# Altium PCB Greinke_Boost_Converter.PcbDoc
Units mil, origin at the board's own origin, x right, y up, seen from the top; angles counter-clockwise.
Board outline 2988 x 3674 mil, 2 copper layers (Top Layer, Bottom Layer); 23 components, 45 nets, 67 pads, 12 vias.
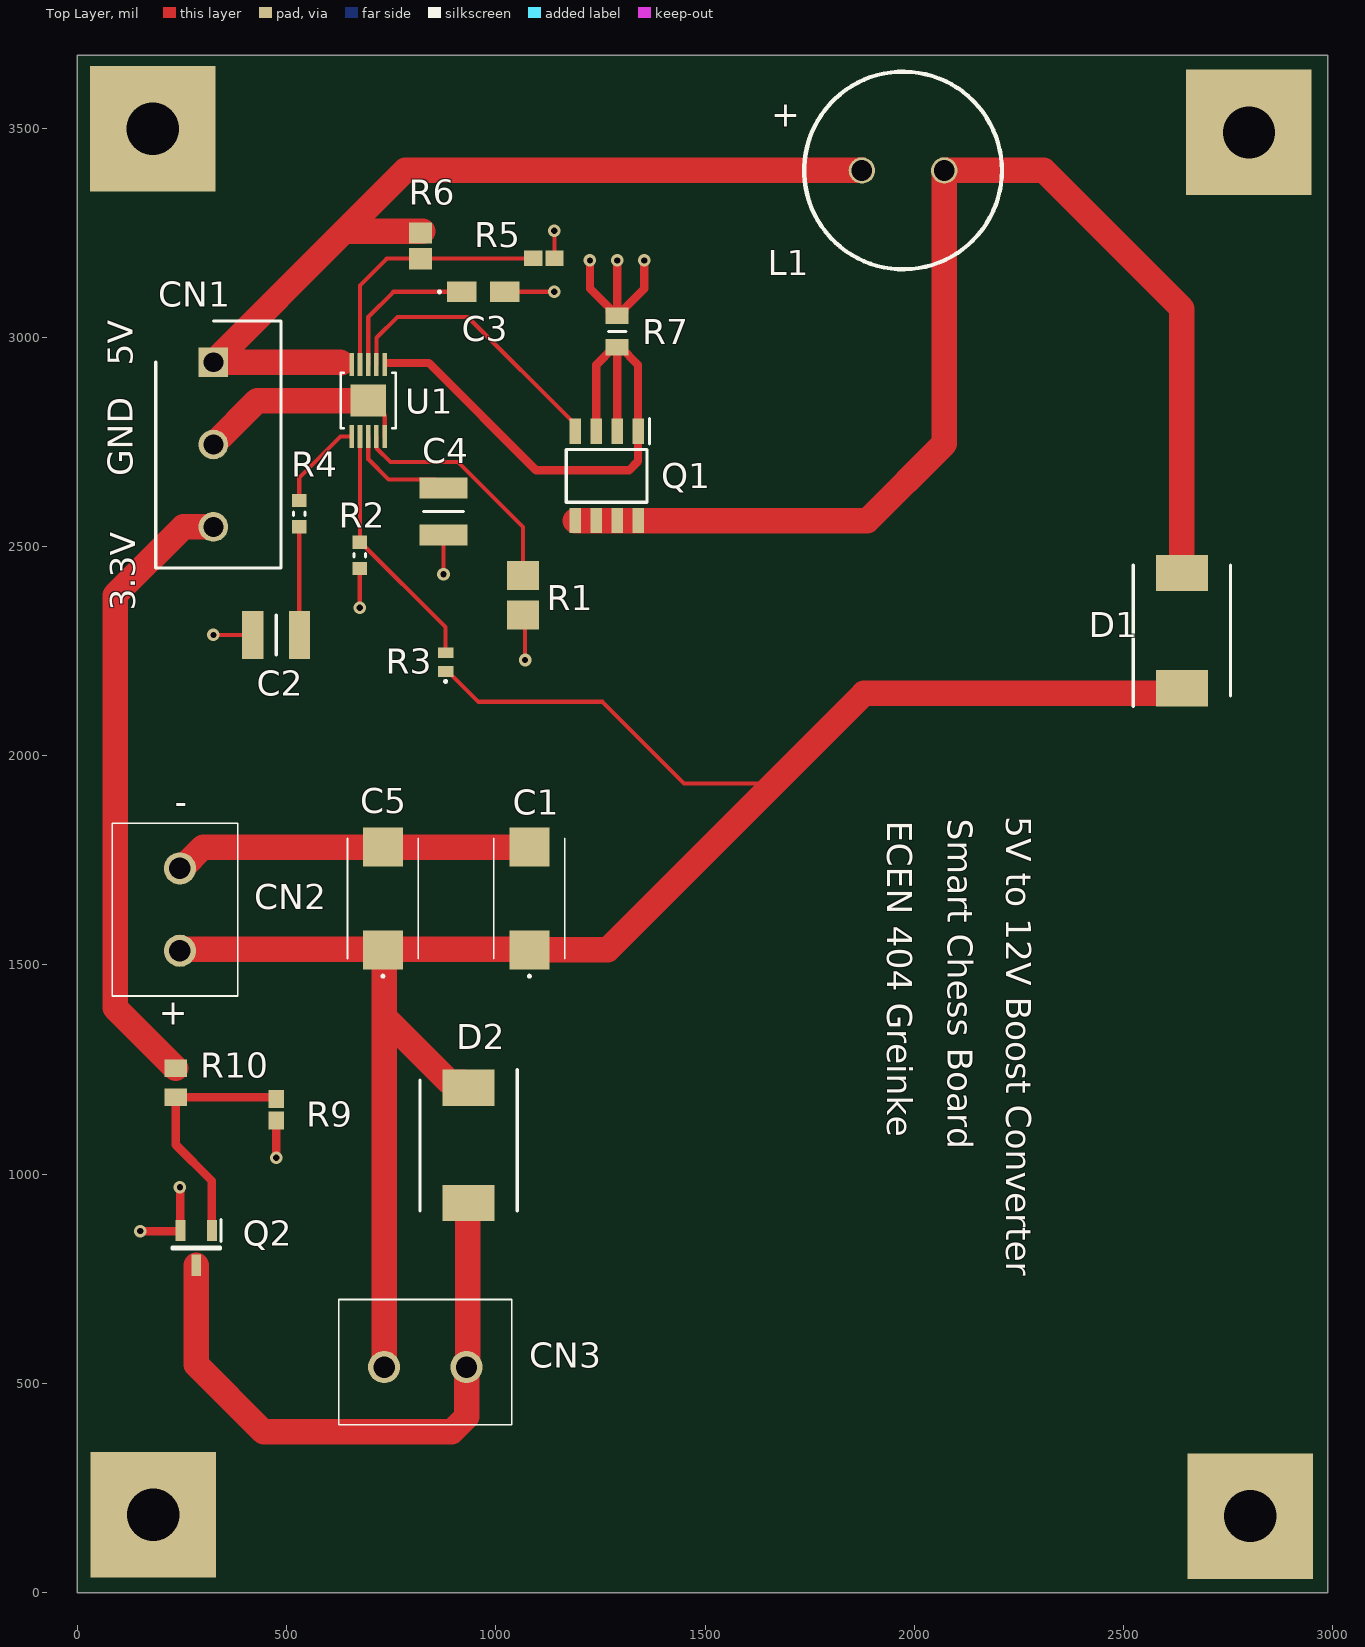
[diagram p0: Top Layer view]
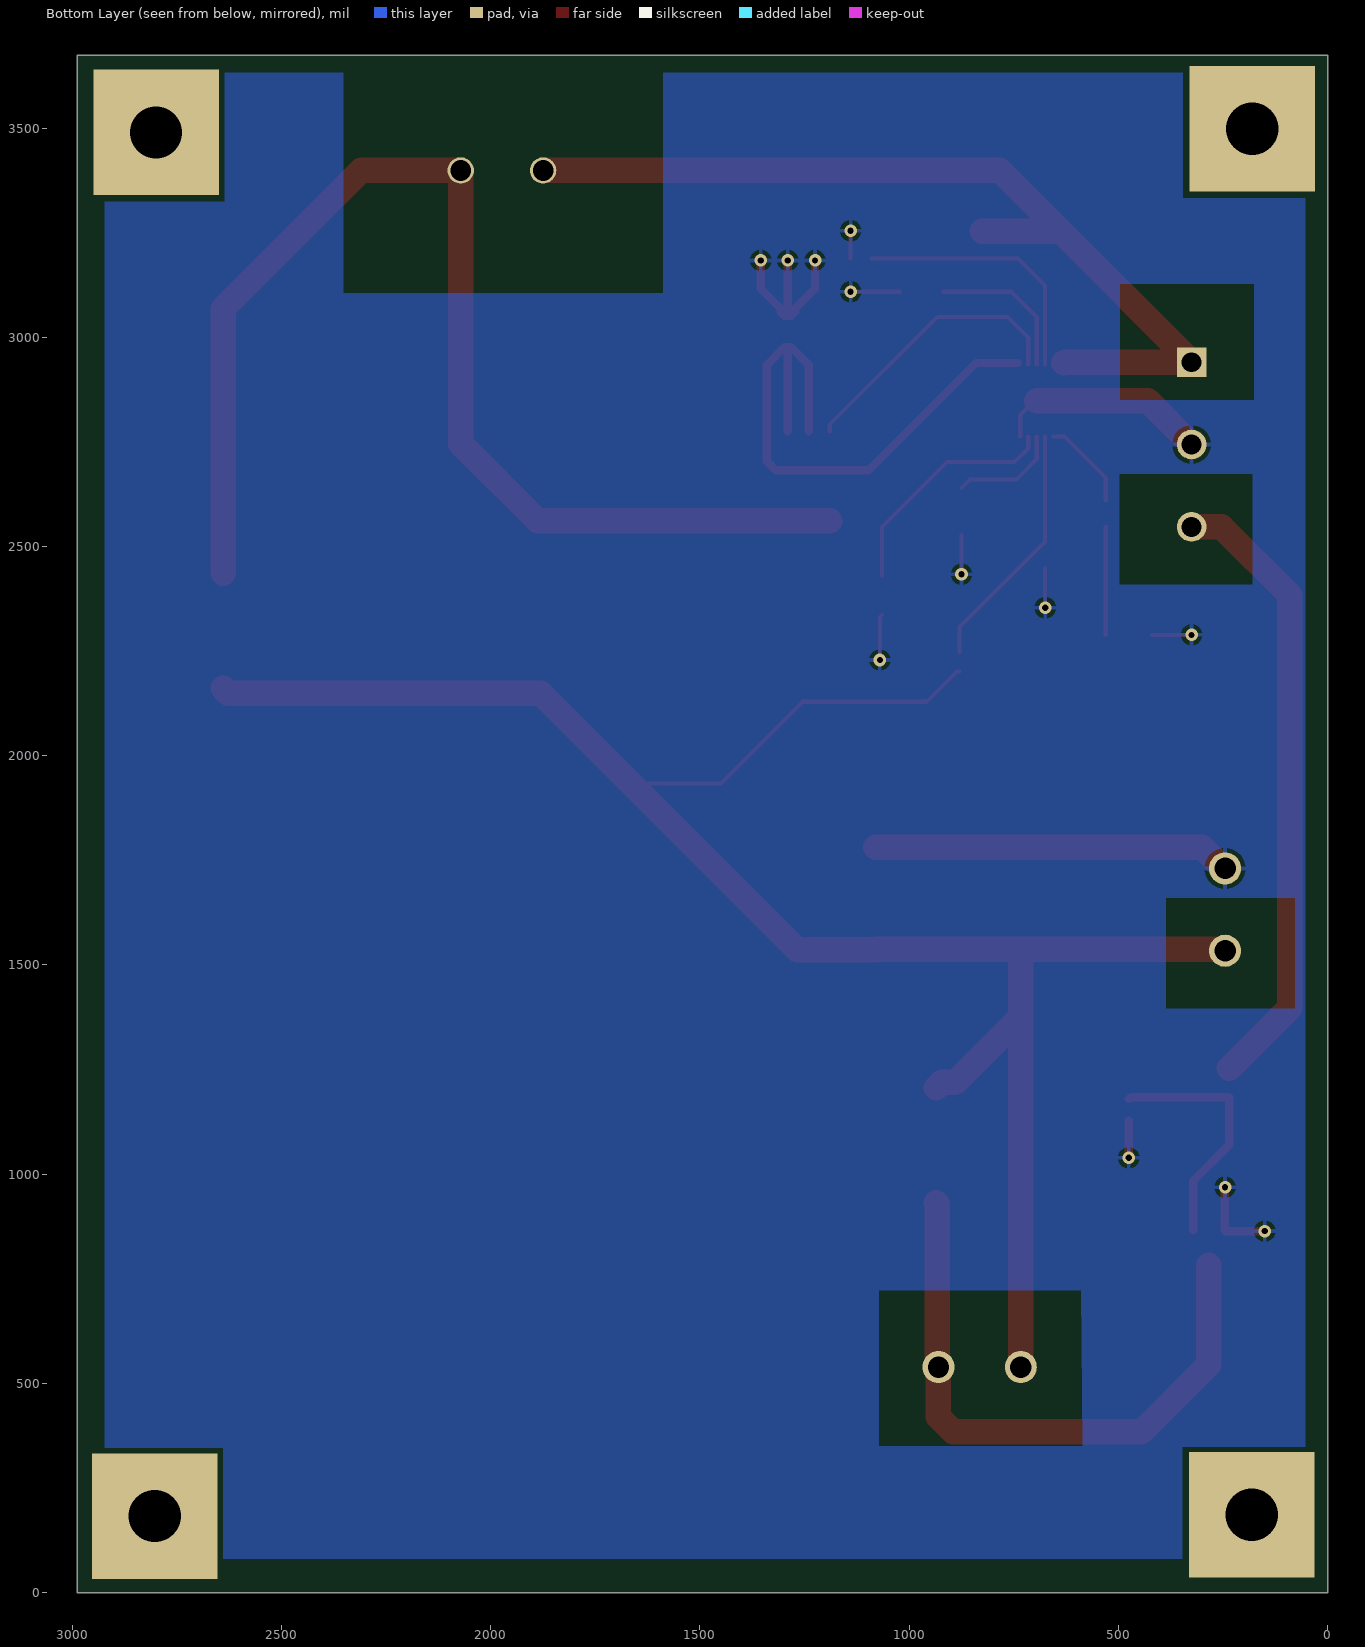
[diagram p1: Bottom Layer view, seen from below]

## Layer stack, top to bottom
Top Solder: solder mask 0.4, Solder Resist, Dk 3.5
Top Layer: signal copper 1.4
Dielectric 1: dielectric 12.6, FR-4, Dk 4.8
Bottom Layer: signal copper 1.4
Bottom Solder: solder mask 0.4, Solder Resist, Dk 3.5

## Board outline
0,0 2988,0 2988,3674 0,3674

## Design rules (kind name [scope] priority, off if disabled: settings)
Clearance [All] p1: gap=5 ignorepadtopadclearanceinfootprint=FALSE
HoleSize [All] p1: absolutevalues=TRUE maxlimit=200 minlimit=5 maxpercent=80.000 minpercent=20.000
PolygonConnect [All] p1: connectstyle=Relief reliefconductorwidth=10 reliefentries=4 polygonreliefangle="90 Angle" airgapwidth=10
RoutingVias [All] p1: holewidth=28 width=50 viastyle="Through Hole" minholewidth=28 minwidth=50 maxholewidth=28 maxwidth=50
SolderMaskExpansion [All] p1: expansion=4 istentingtop=FALSE
Width [All] p1: maxlimit=200 minlimit=5 preferedwidth=10
29 further rules are at their usual default settings.

## Components (designator, comment, footprint, x,y, rotation, side; value= is the part's Value field where it differs from the comment)
C1 "6.8uF" "6.8u Capacitor" 1080,1659 r90 top
C2 "6800pF" "6800p Capacitor" 470,2289 r180 top
C3 "4.7uF" "4.7u Capacitor" 970,3109 r0 top
C4 "0.01uF" "0.01u Capacitor" 875,2589 r90 top
C5 "6.8uF" "6.8u Capacitor" 730,1659 r90 top
CN1 "Connector" "3 Terminal Blocks" 325,2744 r270 top
CN2 "Motors" "2 Terminal Blocks" 245,1534 r90 top
CN3 "Electromagnet" "2 Terminal Blocks" 733.15,539 r0 top
D1 "Schottkey Diode" MBRS340 2640,2299 r90 top
D2 "Schottkey Diode" MBRS340 935,1069 r270 top
L1 "4.7uH" "4.7uH Inductor" 1875,3399 r0 top
Q1 "FDS8880" FDS8880 1265,2669 r270 top
Q2 "MOSFET" Si2316DS 285,824 r270 top
R1 "24.3k" "24.3k Resistor" 1065,2384 r270 top
R2 "11k" "11k Resistor" 675,2479 r270 top
R3 "71.5k" "71.5k Resistor" 880,2224 r90 top
R4 "22k" "22k Resistor" 530,2579 r270 top
R5 "10k" "10k Resistor" 1115,3189 r0 top
R6 "14.7k" "14.7k Resistor" 820,3219 r270 top
R7 "25m" "25m Resistor" 1290,3014 r90 top
R9 "10k" "10k Resistor" 475,1154 r270 top
R10 "1k" "1k Resistor" 235,1218.45 r270 top
U1 "LT3757" LT3757 695,2849 r90 top

## Footprints (in the part's own frame and the unit in brackets; to place one, negate y for a bottom-side part, rotate by r counter-clockwise, add the part's x,y. Pads: shape width x height; smd on the part's side, far side on the other; paste and mask are expansions set on the pad)
"0.01u Capacitor" [mm]
  rect 1.28x2.92 smd: 1(-1.547,0) 2(1.293,0)
  silkscreen extent -0.13,-1.2 -0.13,1.2
"1k Resistor" [mm] "Chip Resistor, 2-Leads, Body 2.00x1.25mm, IPC Medium Density"
  rect 1.05x1.35 smd: 1(-0.875,0) 2(0.875,0)
  body extent -1.05,-0.67 1.05,0.67, height 0.65
"2 Terminal Blocks" [mm]
  round 1.95 hole 1.3: 1(0,0) 2(5,0)
  silkscreen extent -2.75,-3.5 7.75,4.1
"3 Terminal Blocks" [mm]
  rect 1.8x1.8 / inner round 1.8 / far side rect 1.8x1.8 hole 1.2: 1(-5,0)
  round 1.8 hole 1.2: 2(0,0) 3(5,0)
  silkscreen extent -7.5,-3.5 7.5,4.1
"4.7u Capacitor" [mm]
  rect 1.8x1.23 smd: 1(-1.31,0) 2(1.31,0)
  silkscreen extent -2.71,-0.05 -2.61,0.05
"4.7uH Inductor" [mm]
  round 1.6 hole 1.25: 1(0,0) 2(5,0)
  silkscreen extent -3.5,-6 8.5,6
"6.8u Capacitor" [mm]
  rect 2.37x2.43 smd: 1(-3.12,0) 2(3.12,0)
  silkscreen extent -4.77,-2.15 3.65,2.15
"10k Resistor" [mm]
  rect 1.1x0.95 smd: 1(-0.65,0) 2(0.65,0)
"11k Resistor" [mm] "Chip Resistor, 2-Leads, Body 1.60x0.80mm, IPC Medium Density"
  rect 0.8x0.9 smd: 1(-0.8,0) 2(0.8,0)
  silkscreen extent -0.1,-0.35 0.1,0.35, body extent -0.85,-0.45 0.85,0.45, height 0.55
"14.7k Resistor" [mm] "Chip Resistor, 2-Leads, Body 2.00x1.25mm, IPC Medium Density"
  rect 1.3x1.4 smd: 1(-0.775,0) 2(0.775,0)
  body extent -1.07,-0.7 1.07,0.7, height 0.58
"22k Resistor" [mm] "Chip Resistor, 2-Leads, Body 1.60x0.80mm, IPC Medium Density"
  rect 0.8x0.9 smd: 1(-0.8,0) 2(0.8,0)
  silkscreen extent -0.1,-0.35 0.1,0.35, body extent -0.85,-0.45 0.85,0.45, height 0.55
"24.3k Resistor" [mm] "Chip Resistor, 2-Leads, Body 3.05x1.55mm, IPC Medium Density"
  rect 1.75x1.95 smd: 1(-1.2,0) 2(1.2,0)
  body extent -1.73,-0.95 1.73,0.95, height 0.58
"25m Resistor" [mm]
  rect 1x1.4 smd: 1(-0.95,0) 2(0.95,0)
  silkscreen extent 0,-0.53 0,0.53
"71.5k Resistor" [mm]
  rect 0.65x0.95 smd: 1(-0.575,0) 2(0.575,0)
  silkscreen extent -1.22,-0.05 -1.13,0.05
"6800p Capacitor" [mm]
  rect 1.28x2.92 smd: 1(-1.547,0) 2(1.293,0)
  silkscreen extent -0.13,-1.2 -0.13,1.2
FDS8880 [mm]
  rect 1.525x0.7 smd: 1(-2.712,1.905) 2(-2.712,0.635) 3(-2.712,-0.635) 4(-2.712,-1.905) 5(2.712,-1.905) 6(2.712,-0.635) 7(2.712,0.635) 8(2.712,1.905)
  silkscreen extent -3.47,-2.45 1.6,2.61
LT3757 [mil]
  rect 55x11 smd: 1(-86,39.4) 2(-86,19.7) 3(-86,0) 4(-86,-19.7) 5(-86,-39.4) 6(86,-39.4) 7(86,-19.7) 8(86,0) 9(86,19.7) 10(86,39.4)
  rect 76x85 smd paste-78.74: 11(0,0)
  silkscreen extent -66,-66 66,66, body extent -59,-96 59,96, height 20
MBRS340 [mm]
  rect 2.2x3.15 smd: 1(-3.5,0) 2(3.5,0)
  silkscreen extent -4.6,-2.95 3.97,2.95
Si2316DS [mm]
  rect 1.3x0.6 smd: 1(-1.05,0.925) 2(-1.05,-0.975) 3(1.05,-0.025)
  silkscreen extent -1.7,-1.49 0.05,1.47

## Part data
C1 C5: library part "6.8u Capacitor"
C2: library part "6800p Capacitor"
C3: library part "4.7u Capacitor"
C4: library part "0.01u Capacitor_1"
CN1: library part "3 Terminal Blocks"
CN2 CN3: library part "2 Terminal Blocks"
D1 D2: library part MBRS340
L1: library part "4.7uH Inductor"
Q2: library part Si2316DS
R1: library part "24.3k Resistor"
R2: library part "11k Resistor"
R3: library part "71.5k Resistor"
R4: library part "22k Resistor"
R5 R9: library part "10k Resistor"
R6: library part "14.7k Resistor"
R7: library part "25m Resistor"
R10: library part "1k Resistor"

## Free pads (board coordinates)
  rect 300x300 hole 125: MH(180,3499) MH(181,186) MH(2800,3490) MH(2803,183)

## Via types
v1: diameter 30, hole 15, Top Layer to Bottom Layer, 12 vias

## Nets (pads, with @x,y where several pads share a name; then routed paths per layer and width w, separated by ;. In a path a pad name is that pad's centre, name@x,y a point inside that pad or via, vN(x,y) a via of type N, cw(c..) or ccw(c..) an arc to the next point about the centre after c; other vN are vias at no path point)
NetC1_1: C1.1 C5.1 CN2.1 CN3.1 D1.1 D2.1 R3.1 | length 4804.6
  Top Layer w10: R3.1 885.91,2201.36 958.27,2129 1255,2129 1450,1934 1665,1934
  Top Layer w61: CN2.1@248.74,1537.74 249.46,1537.02 259.17,1537.02 259.89,1537.74 C5.1@728.43,1537.74 ; C5.1@731.57,1537.74 C1.1@1078.43,1537.74 ; CN3.1 733.15,1368.33 ; C5.1@733.15,1533.02 733.15,1368.33 ; D2.1 922.19,1219.6 889.4,1219.6 740.67,1368.33 733.15,1368.33 ; C1.1 1267.17,1536.17 1665,1934 1880,2149 2627.8,2149 D1.1
NetC1_2: C1.2 C2.2 C3.2 C4.1 C5.2 CN1.2 CN2.2 Q2.2 R1.2 R2.2 R5.2 R7.2 R9.2 U1.5 U1.11 | length 2702.9
  Top Layer w10: v1(245,969) v1@245.8,968.2 ; Q2.2@245.26,864 Q2.2 Q2.2@245.8,866.14 ; v1(325,2289) C2.2 ; v1(675,2354) R2.2 ; U1.11 699.5,2849 734.4,2814.1 U1.5 ; v1(875,2434) C4.1 ; C3.2 v1(1140,3109) v1@1140.3,3109.3 ; R1.2 1070,2331.76 v1(1070,2229) ; v1(1140,3255) 1140,3189.59 R5.2
  Top Layer w20: v1(150,864) Q2.2@245.26,864 ; Q2.2@245.8,866.14 v1@245.8,968.2 ; v1(475,1039) R9.2 ; v1(1225,3184) 1225,3116.4 1272.44,3068.96 1272.44,3061.09 1282.13,3051.4 R7.2 ; v1(1290,3184) R7.2 ; v1(1355,3184) 1355,3116.4 1307.56,3068.96 1307.56,3061.09 1297.87,3051.4 R7.2
  Top Layer w61: CN2.2 249.27,1730.85 300.25,1781.83 C5.2 C1.2 ; CN1.2 430,2849 U1.11
NetC2_1: C2.1 R4.2 | length 258.9
  Top Layer w10: R4.2 530,2289.91 C2.1
NetC3_1: C3.1 U1.8 | length 362.3
  Top Layer w10: U1.8 695,3049 755,3109 C3.1
NetC4_2: C4.2 U1.3 | length 262.6
  Top Layer w10: U1.3 695,2709 743.9,2660.1 854.8,2660.1 C4.2
NetC11_1: 
NetC11_2: 
NetC22_1: 
NetC33_1: 
NetC44_2: 
NetC111_1: 
NetC111_2: 
NetC222_1: 
NetC333_1: 
NetC444_2: 
NetCN1_1: CN1.1 L1.1 R6.1 U1.10 | length 2232.4
  Top Layer w61: 630,2939 628.15,2940.85 CN1.1 638.15,3254 ; R6.1@825,3254 638.15,3254 ; L1.1 783.15,3399 638.15,3254
NetCN1_3: CN1.3 R10.1 | length 1493.7
  Top Layer w61: R10.1 90,1397.9 90,2384 253.15,2547.15 CN1.3
NetCN3_2: CN3.2 D2.2 Q2.3 | length 1478.7
  Top Layer w61: Q2.3 284,545 445,384 894.27,384 930,419.73 CN3.2 932.5,541.5 932.5,928.7 D2.2
NetCN11_1: 
NetCN11_2: 
NetCN11_3: 
NetCN111_1: 
NetD1_2: D1.2 L1.2 Q1.5 Q1.6 Q1.7 Q1.8 | length 2948.1
  Top Layer w61: Q1.5 Q1.6 Q1.7 Q1.8 1888.23,2562.23 2071.85,2745.85 L1.2 2310,3399 2640,3069 D1.2
NetD11_2: 
NetD111_2: 
NetL11_1: 
NetQ1_1: Q1.1 Q1.2 Q1.3 R7.1 U1.6 | length 1440.2
  Top Layer w20: 740,2939 840,2939 1096.72,2682.28 1318.28,2682.28 1340,2704 Q1.1 1340,2934.47 1297.87,2976.6 R7.1 ; Q1.3 1240,2934.47 1282.13,2976.6 R7.1 ; Q1.2 R7.1
NetQ1_4: Q1.4 U1.7 | length 682.5
  Top Layer w10: U1.7 715.2,2935.5 715.2,2999.2 765,3049 933.01,3049 1190,2792.01 Q1.4
NetQ2_1: Q2.1 R9.1 R10.2 | length 596.3
  Top Layer w20: Q2.1 321.4,983.93 235,1070.33 R10.2 470.59,1184 R9.1
NetQ11_1: 
NetQ11_4: 
NetQ111_1: 
NetQ111_4: 
NetR1_1: R1.1 U1.4 | length 571.4
  Top Layer w10: U1.4 715.2,2762.5 715.2,2735.06 748.11,2702.15 909.57,2702.15 1065,2546.72 R1.1
NetR2_1: R2.1 R3.2 U1.2 | length 602.6
  Top Layer w10: U1.2 675.3,2510.8 R2.1 676.97,2510.5 880,2307.46 R3.2
NetR4_1: R4.1 U1.1 | length 220.1
  Top Layer w10: R4.1 530,2664 629,2763 U1.1
NetR5_1: R5.1 R6.2 U1.9 | length 630.2
  Top Layer w10: U1.9 675.3,3124.3 739.49,3188.49 R6.2 1088.9,3188.49 R5.1
NetR11_1: 
NetR22_1: 
NetR44_1: 
NetR55_1: 
NetR111_1: 
NetR222_1: 
NetR444_1: 
NetR555_1: 

## Polygon pours and split planes (outlines as drawn)
NetC1_2 on Bottom Layer "GND" (solid, pour order 0): 53,3632 2923,3632 2923,81 53,81

## Other copper
Bottom Layer:
  pour cut-out: 78,1659.85 386,1659.85 386,1397 78,1397
  pour cut-out: 180,2673 497,2673 497,2410.15 180,2410.15
  pour cut-out: 177,3126.85 495,3126.85 495,2851 177,2851
  pour cut-out: 1587.67,3652 2353,3652 2353,3106 1587.67,3106
  pour cut-out: 590,722 1072,722 1072,721 1072,720 1072,351 587,351 586,351
  pour cut-out: 17,349 347,349 347,20 17,20
  pour cut-out: 2639,346 2969,346 2969,17 2639,17
  pour cut-out: 2636,3653 2966,3653 2966,3324 2636,3324
  pour cut-out: 16,3662 346,3662 346,3333 16,3333

## Silkscreen, mask and mechanical layers (free items; w line width, h text height)
Top Overlay:
  text "+" at 1658,3504 h60
  text "5V" at 132,2932 h60 r90
  text "GND" at 132,2668 h60 r90
  text "3.3V" at 138,2347 h60 r90
  text "-" at 262,1905.99 h60 r180
  text "5V to 12V Boost Converter" at 2220,1855 h60 r270
  text "Smart Chess Board" at 2080,1850 h60 r270
  text "ECEN 404 Greinke" at 1935,1845 h60 r270
  text "+" at 264,1410 h60 r180
Board Outline:
  the board outline again, w10